# Altium PCB 1-10V_PIR_V1.0.PcbDoc (part 1 of 2)
Units mil, origin at the board's own origin, x right, y up, seen from the top; angles counter-clockwise.
Board outline 1736.22 x 1720.47 mil, 4 copper layers (Top Layer, Layer 1, Layer 2, Bottom Layer), stack 61.811 mil thick; 71 components, 58 nets, 292 pads, 69 vias.
Unrouted connection lines stored in the file: 118.
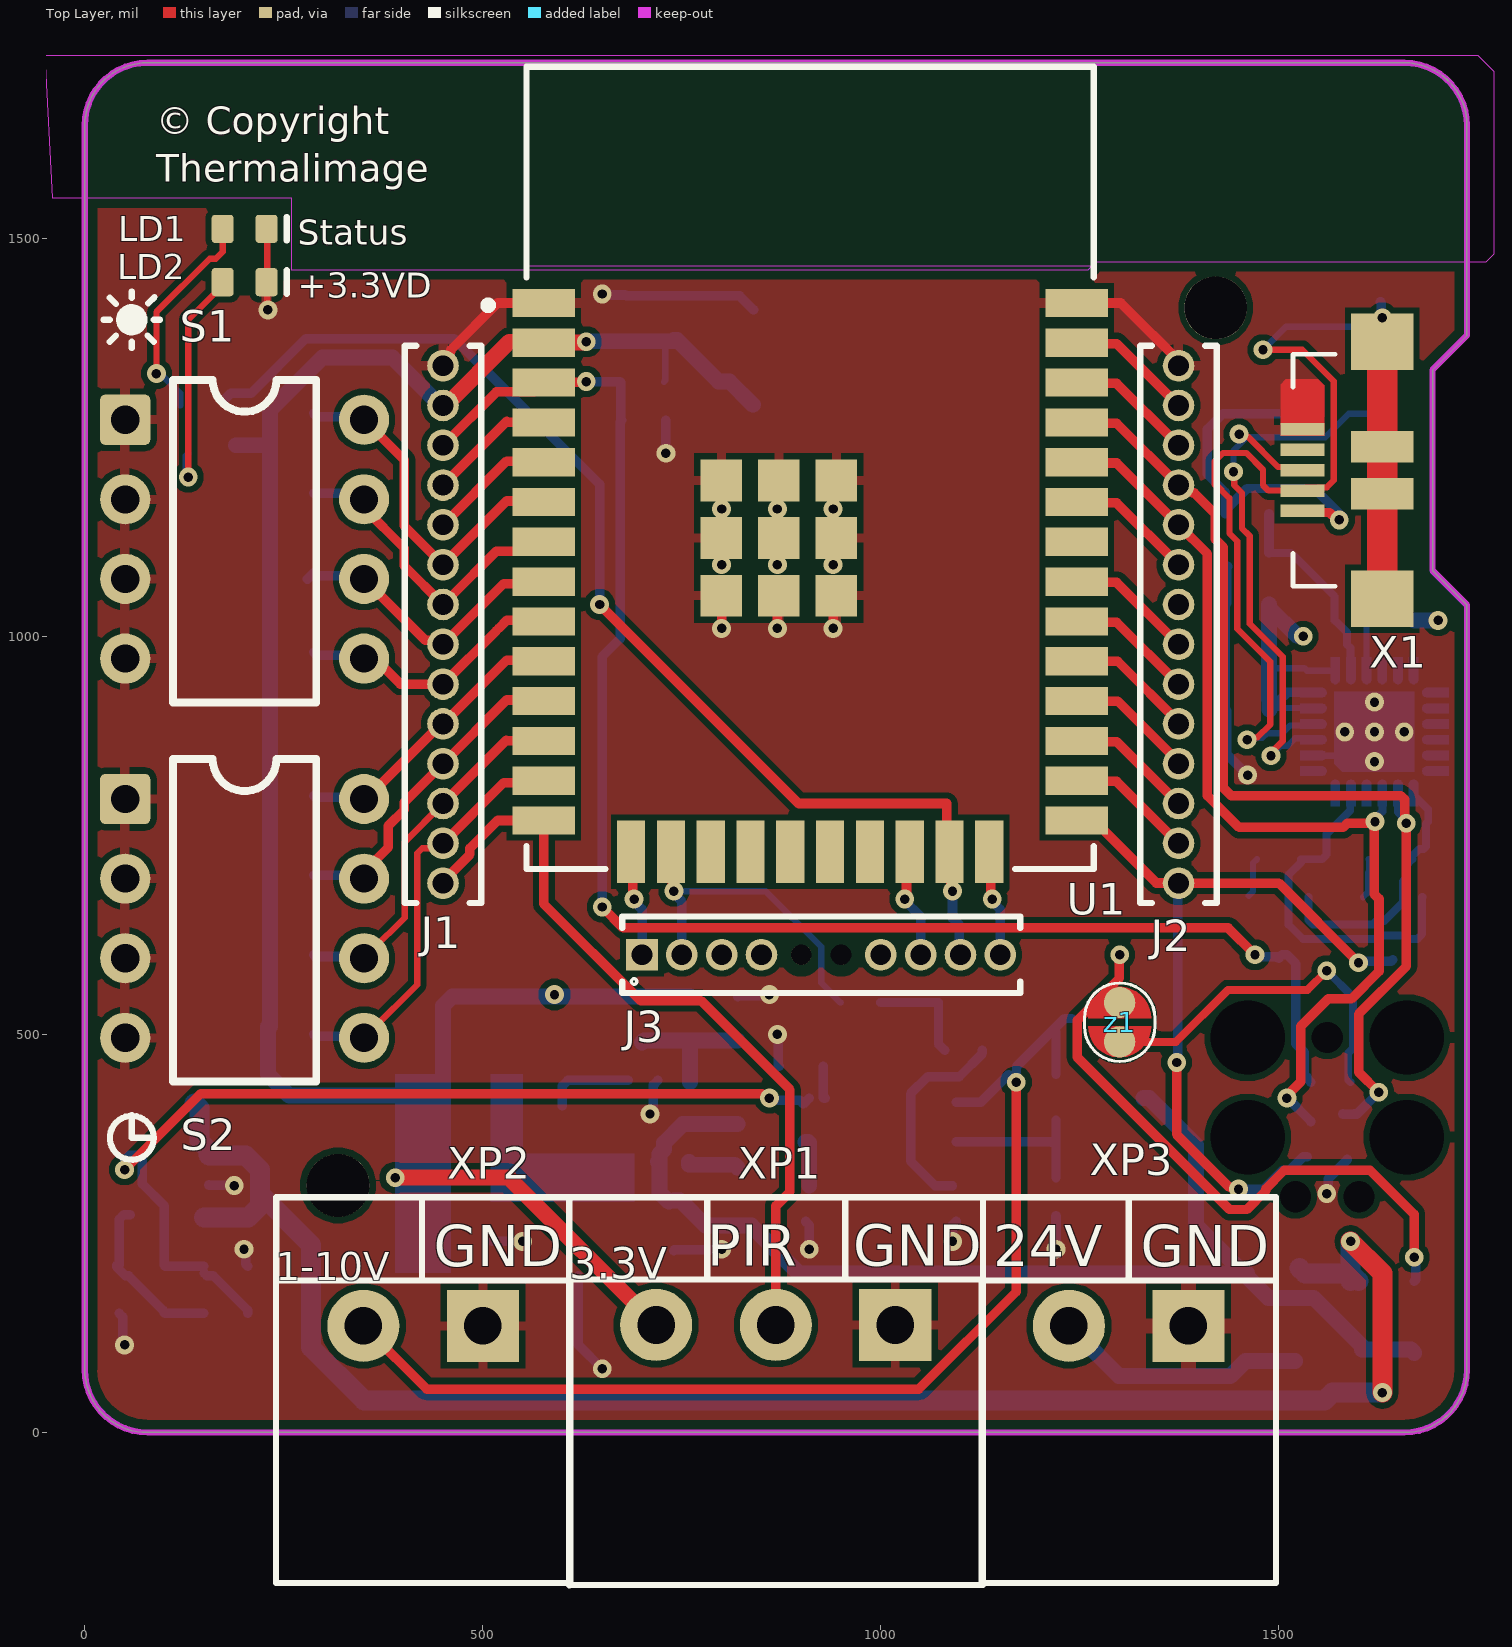
[diagram p0: Top Layer view]
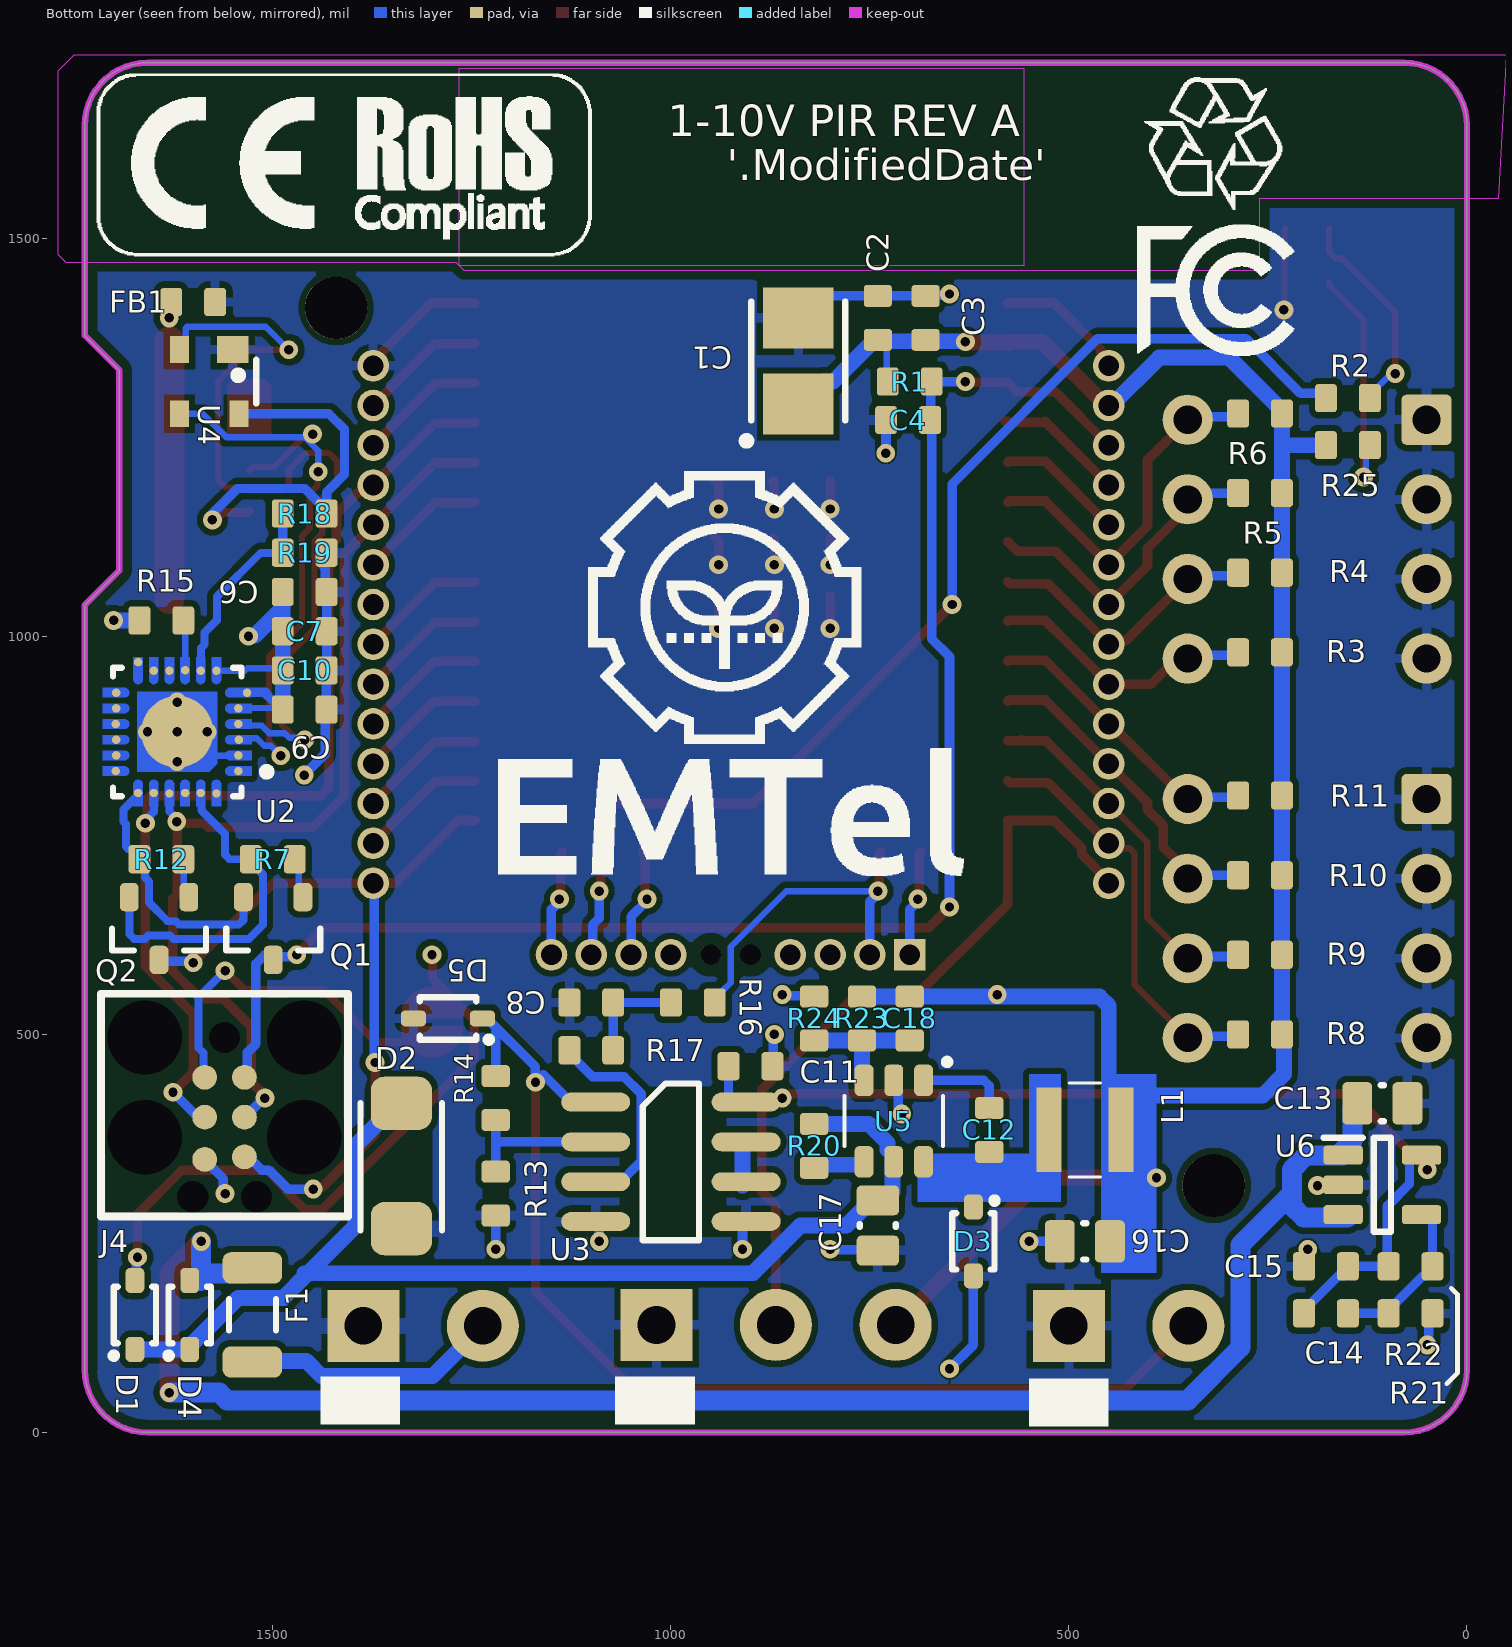
[diagram p1: Bottom Layer view, seen from below]
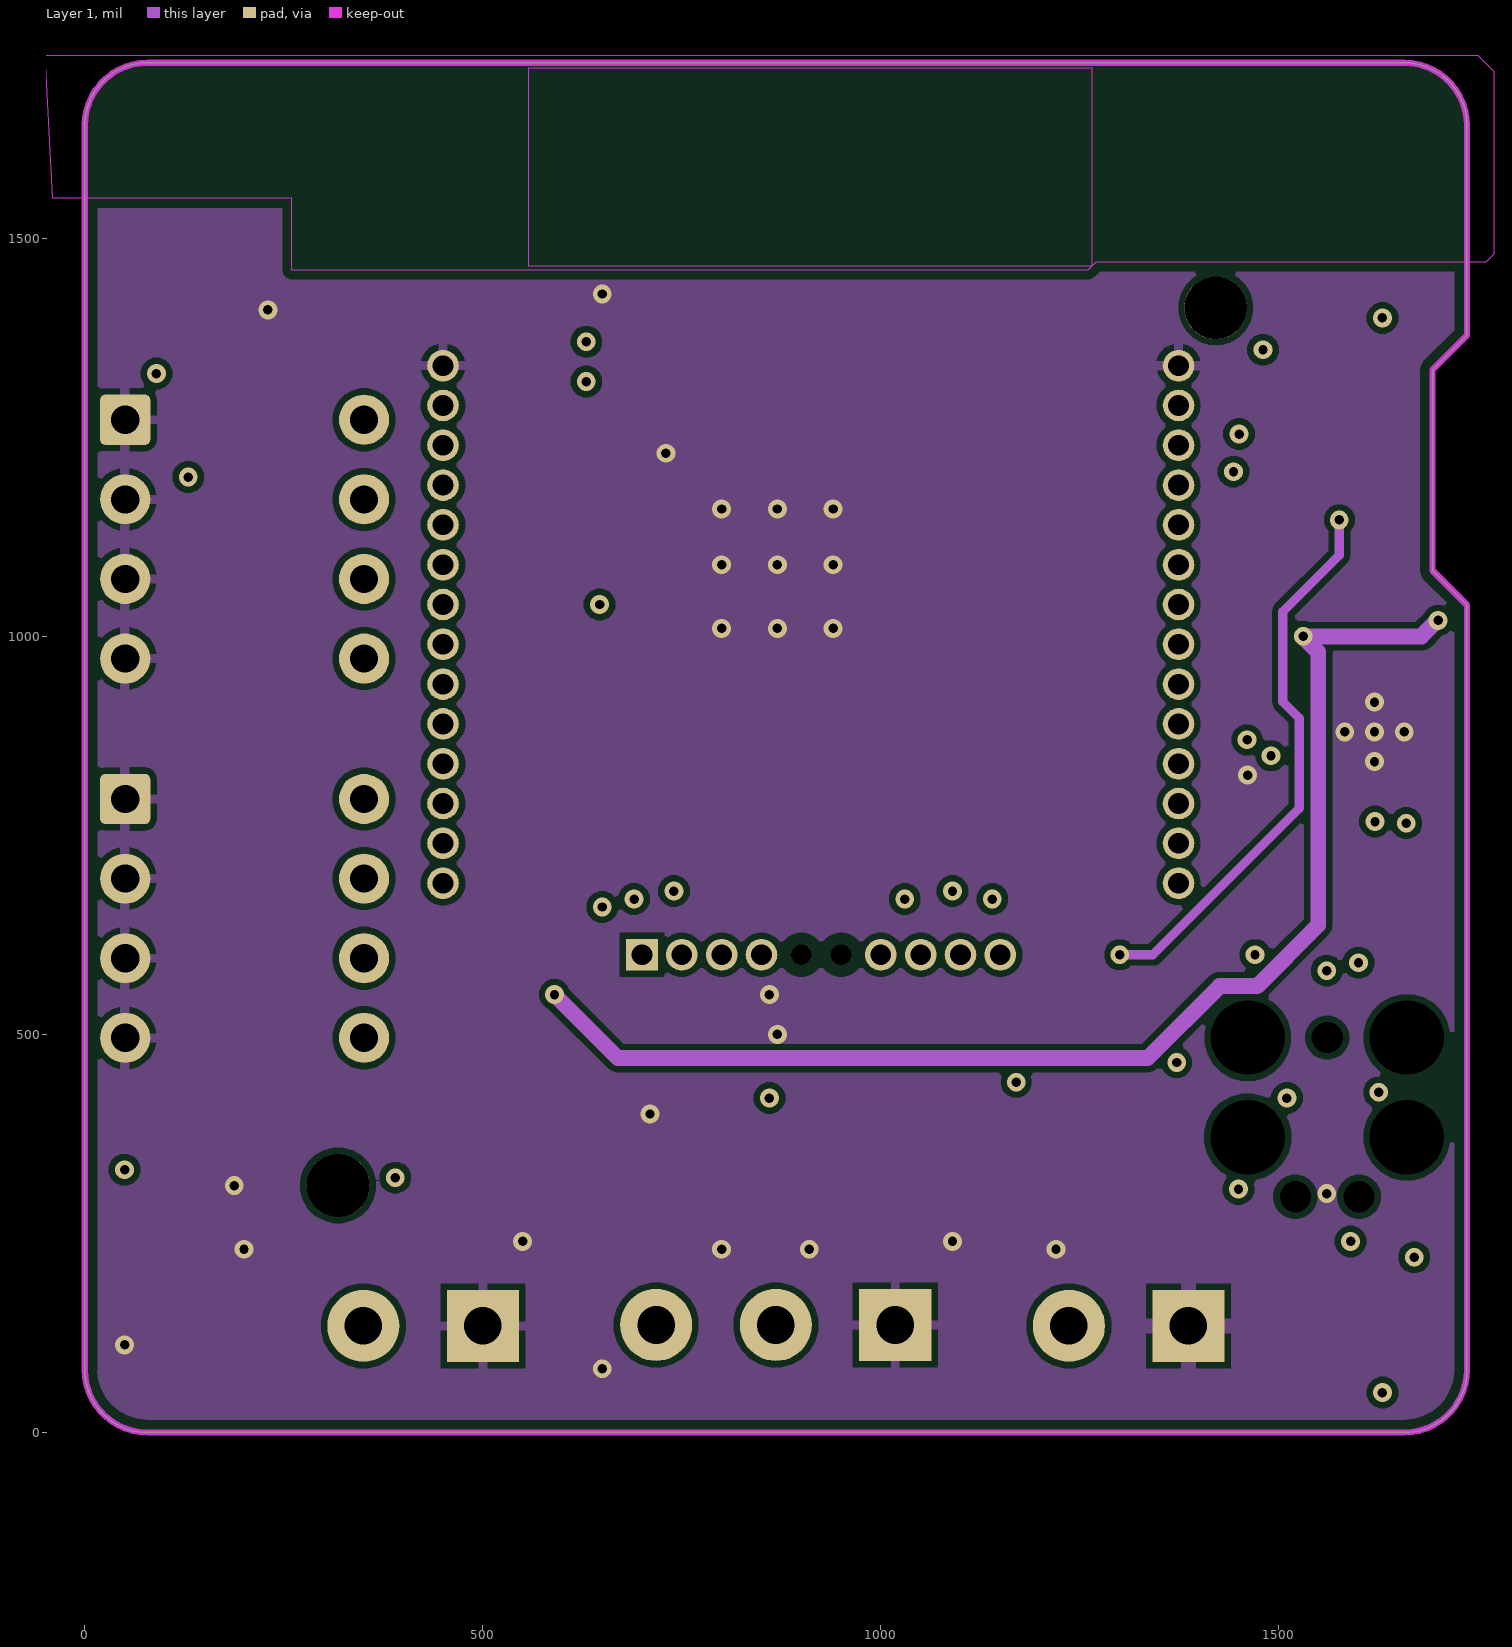
[diagram p2: Layer 1]
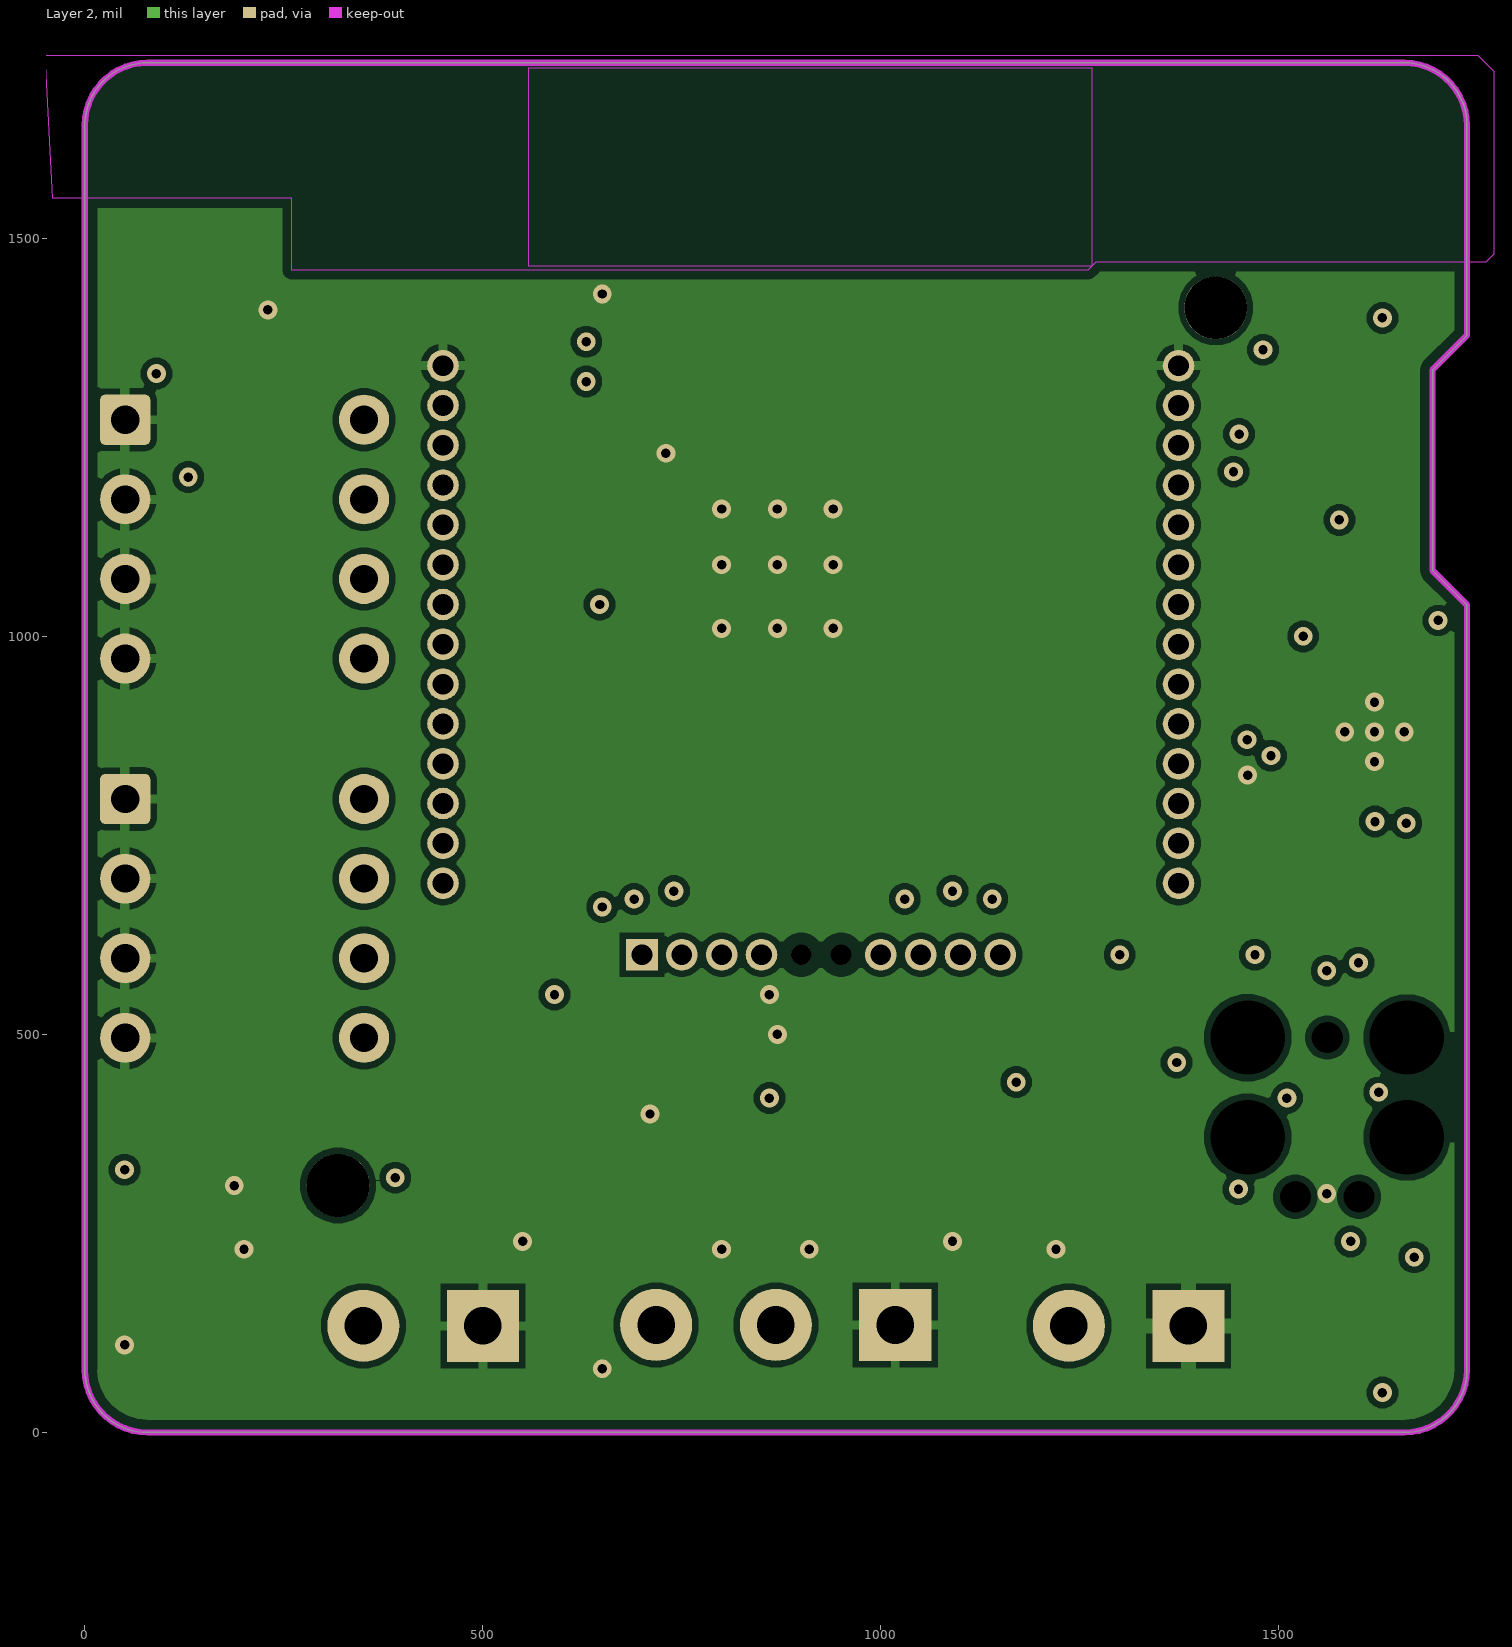
[diagram p3: Layer 2]
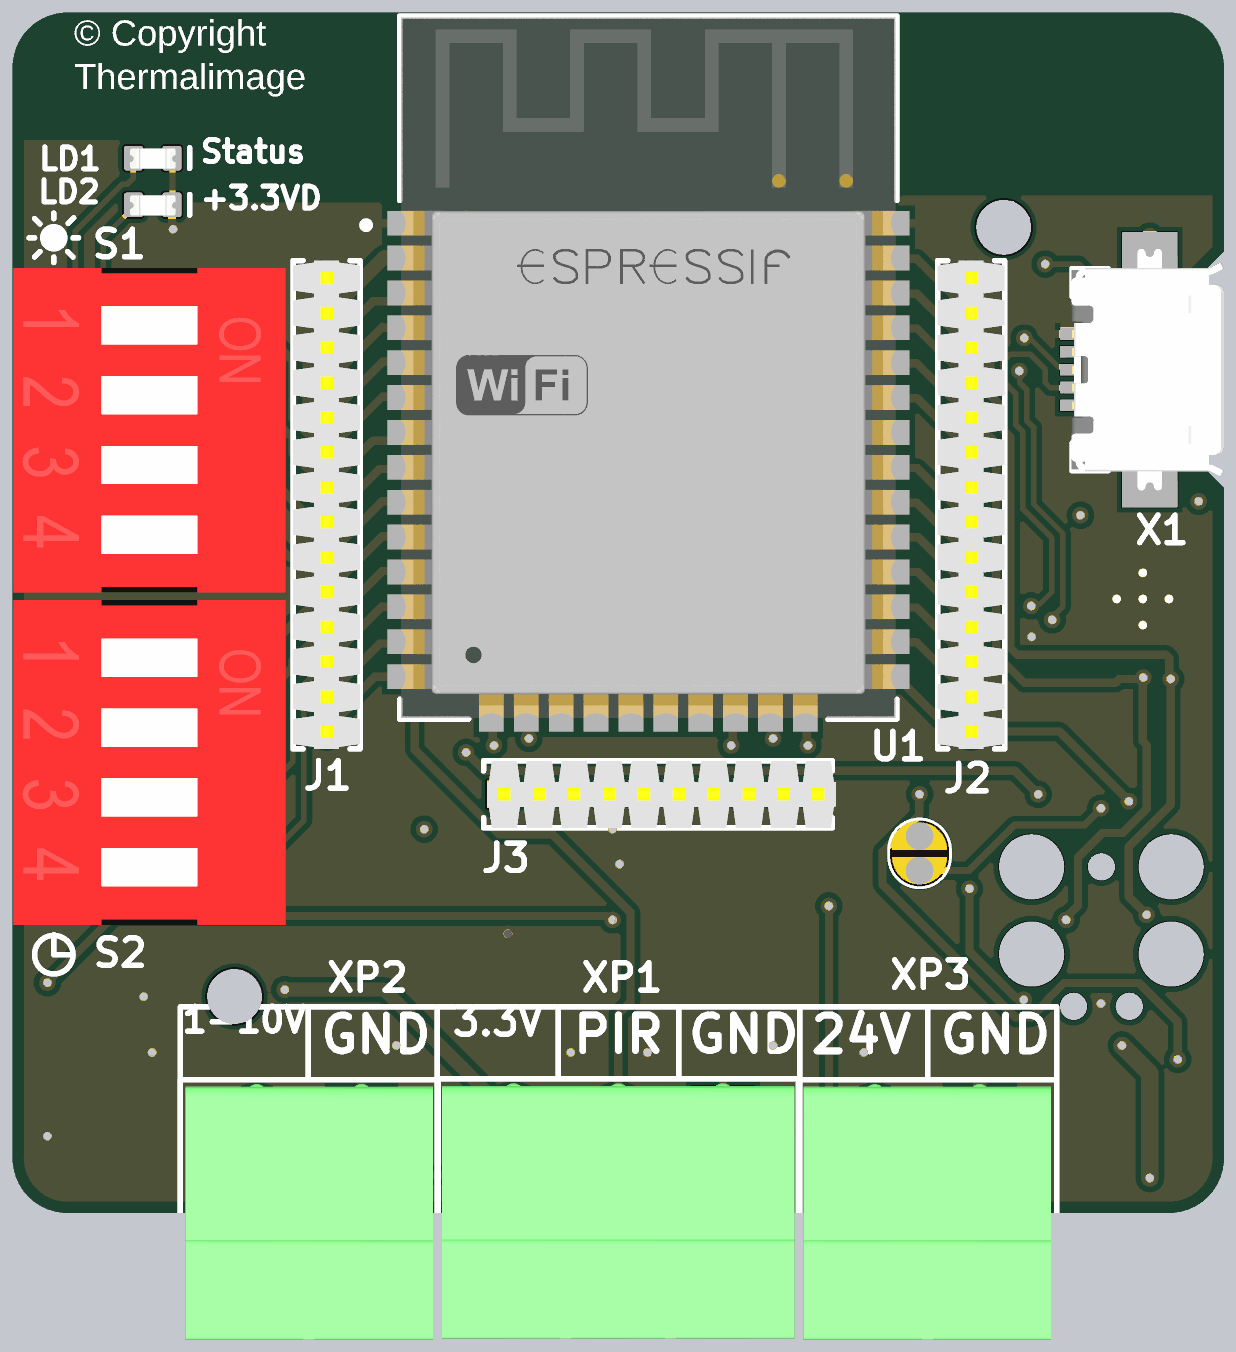
[diagram p5: 3D render of the assembled board from above, using the file's embedded part models]
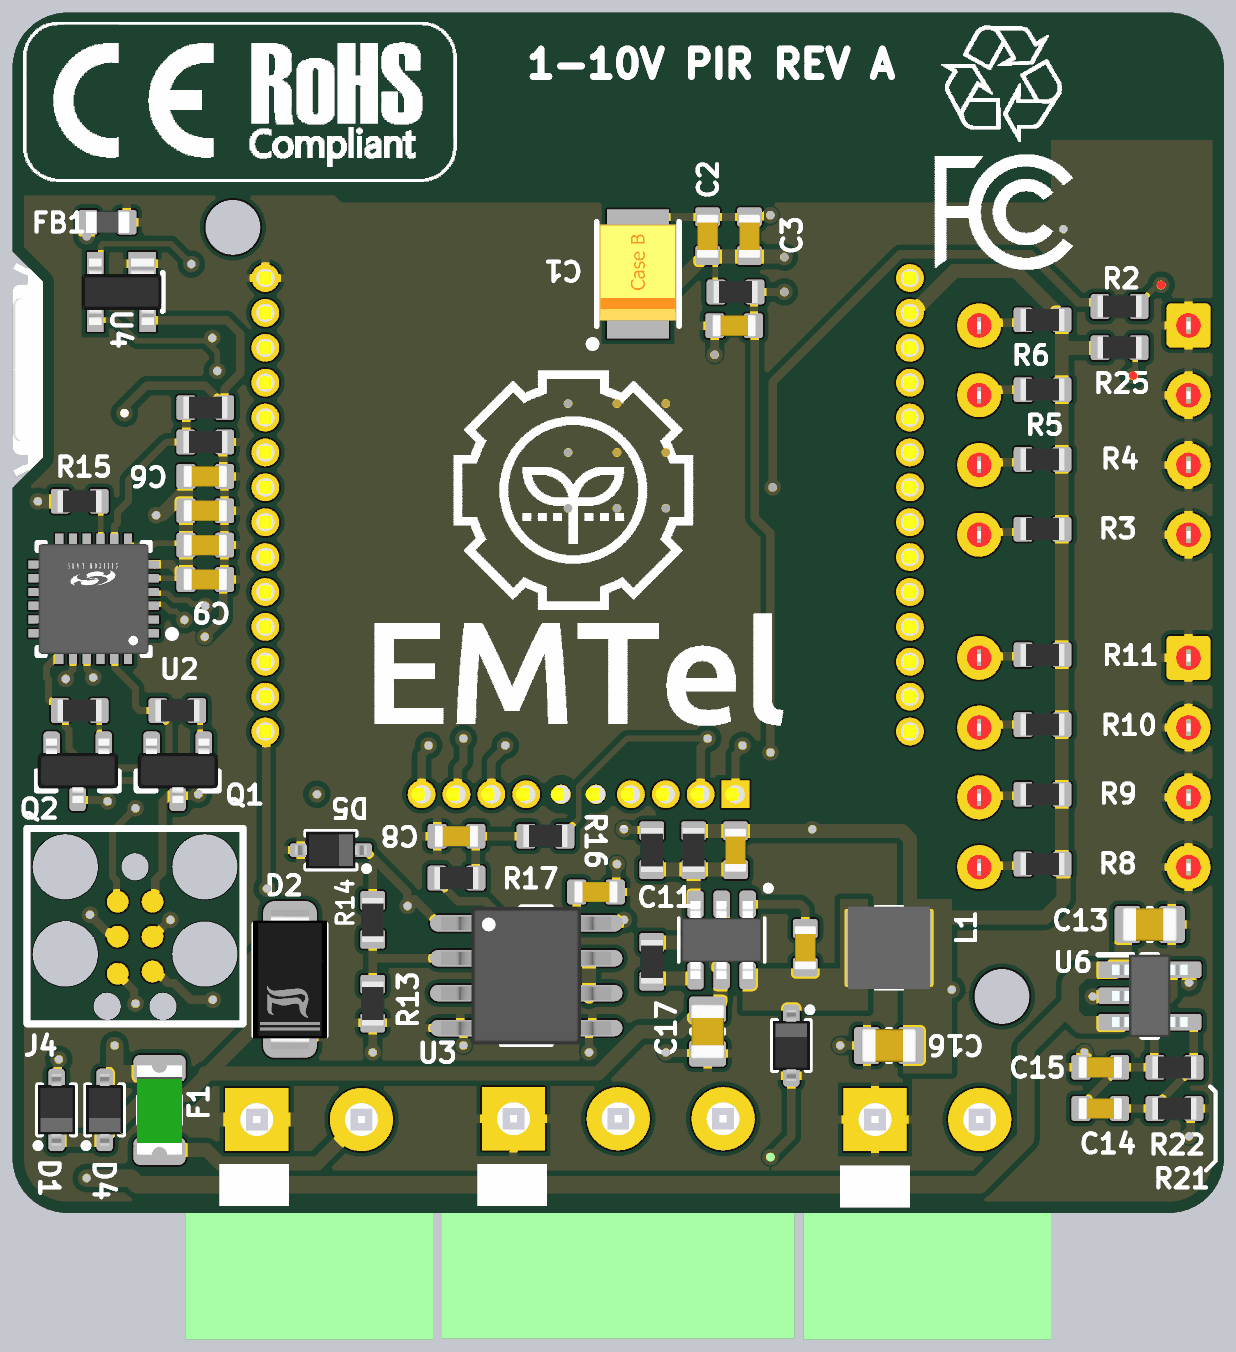
[diagram p6: 3D render of the assembled board from below, using the file's embedded part models]

## Layer stack, top to bottom
Top Solder: solder mask 0.7874, Solder Resist, Dk 3.8
Top Layer: signal copper 1.378
Dielectric 2: prepreg 7.874, 7628, Dk 4.6
Layer 1: signal copper 0.689
Dielectric 1: dielectric 41.9291, FR-4, Dk 4.5
Layer 2: signal copper 0.689
Dielectric 3: prepreg 7.874, 7628, Dk 4.6
Bottom Layer: signal copper 1.378
Bottom Solder: solder mask 0.7874, Solder Resist, Dk 3.8

## Board outline
0,78.74 ccw(c78.74,78.74) 78.74,0 1657.48,0 ccw(c1657.48,78.74) 1736.22,78.74 1736.22,1039.37 1692.91,1082.68 1692.91,1334.65 1736.22,1377.95 1736.22,1641.73 ccw(c1657.48,1641.73) 1657.48,1720.47 78.74,1720.47 ccw(c78.74,1641.73) 0,1641.73

## Design rules (kind name [scope] priority, off if disabled: settings)
BoardOutlineClearance [IsPolygon] p1: gap=5 ignorepadtopadclearanceinfootprint=FALSE
Clearance Clearance_Keep_Out [OnLayer('Keep-Out Layer')] p1: gap=11.81 ignorepadtopadclearanceinfootprint=FALSE
Clearance [All] p2: gap=7.87 ignorepadtopadclearanceinfootprint=FALSE except(0: Arc-Hole Track-Hole SMDPad-Hole THPad-Hole Via-Hole Fill-Hole Poly-Hole Region-Hole Text-Hole)
DiffPairsRouting [All] p1: maxlimit=7.87 minlimit=7.87 mostfreqgap=7.87 toplayer_minwidth=7.87 toplayer_maxwidth=7.87 toplayer_prefwidth=7.87 midlayer1_minwidth=7.87 midlayer1_maxwidth=7.87 midlayer1_prefwidth=7.87 midlayer2_minwidth=7.87 midlayer2_maxwidth=7.87 midlayer2_prefwidth=7.87 bottomlayer_minwidth=7.87 bottomlayer_maxwidth=7.87 bottomlayer_prefwidth=7.87 maxuncoupledlength=500
MinimumSolderMaskSliver [All] p1: minsoldermaskwidth=3.94
PolygonConnect PolygonConnect_Vias [All vs IsVia] p1: connectstyle=Direct reliefconductorwidth=10 reliefentries=4 polygonreliefangle="90 Angle" airgapwidth=10
PolygonConnect PolygonConnect_Comp [All vs InComponent('XP3') or InComponent('D2')] p2: connectstyle=Relief reliefconductorwidth=19.68 reliefentries=4 polygonreliefangle="90 Angle" airgapwidth=7.87
PolygonConnect [All] p3: connectstyle=Relief reliefconductorwidth=11.81 reliefentries=4 polygonreliefangle="90 Angle" airgapwidth=7.87
RoutingVias [All] p1: holewidth=28 width=50 viastyle="Through Hole" minholewidth=11.81 minwidth=23.62 maxholewidth=28 maxwidth=50
SilkToSilkClearance [All] p1: silktosilkclearance=3.94
SilkToSolderMaskClearance [IsPad] p1: minsilkscreentomaskgap=5.91 clearancetoexposedcopper=TRUE
SolderMaskExpansion SolderMaskExpansion_vias [isvia] p1: expansion=4 istentingtop=TRUE
SolderMaskExpansion [All] p2: expansion=2.76 istentingtop=FALSE
Width [All] p1: maxlimit=39.37 minlimit=7.87 preferedwidth=7.87
26 further rules are at their usual default settings.

## Classes and differential pairs
component class "[2] - PWR": C12 C13 C14 C15 C16 C17 C18 D1 D2 D3 D4 F1 L1 LD2 R20 R21 R22 R23 R24 R25 U5 U6 XP3
component class "[1] - MCU": C1 C2 C3 C4 C6 C7 C8 C9 C10 C11 D5 FB1 J1 J2 J3 J4 LD1 Q1 Q2 R1 R2 R3 R4 R5 R6 R7 R8 R9 R10 R11 R12 R13 R14 R15 R16 R17 R18 R19 S1 S2 U1 U2 U3 U4 X1 XP1 XP2 z1
differential pair USB: +USB_P -USB_N

## Components (designator, comment, footprint, x,y, rotation, side; value= is the part's Value field where it differs from the comment)
C1 "330uF" "TANT CAP CASE B" 840,1345.87 r90 bottom
C2 "1uF" CC0603 740,1400 r90 bottom
C3 "100nF" CC0603 680,1400 r90 bottom
C4 "1uF" CC0603 702.02,1271.68 r0 bottom
C6 "4.7uF" CC0603 1460,1055.69 r180 bottom
C7 "100nF" CC0603 1460,1006.44 r180 bottom
C8 "100nF" CC0603 1100,540 r0 bottom
C9 "4.7uF" CC0603 1460,907.95 r180 bottom
C10 "100nF" CC0603 1460,957.2 r180 bottom
C11 "100nF" CC0603 900,460 r180 bottom
C12 "100nF" CC0603 600,380 r90 bottom
C13 "4.7uF" CC0805 106.3,413.39 r180 bottom
C14 "1nF" CC0603 177.17,149.61 r180 bottom
C15 "1uF" CC0603 177.17,208.66 r0 bottom
C16 "22uF" CC0805 480,240 r0 bottom
C17 "4.7uF" CC0805 740,260 r270 bottom
C18 "33pF" CC0603 700,520 r90 bottom
D1 "Diode" SOD323#1 1673.23,147.64 r90 bottom
D2 "SMAJ30CA" SMA 1338.58,334.65 r90 bottom
D3 "Diode" SOD323#1 620,240 r270 bottom
D4 "PMEG3010BEA,115" SOD323#1 1604.33,147.64 r90 bottom
D5 "CDSOD323-T12SC" SOD323#2 1280,520 r0 bottom
F1 "0ZCJ0016FF2E" FUSE1206 1525.59,147.64 r90 bottom
FB1 "120R/800mA" ind0603 1600,1420 r0 bottom
J1 "TMS-114-02-L-S" TMS-114-YY-XX-S 450,1340 r270 top locked
J2 "TMS-114-02-L-S" TMS-114-YY-XX-S 1373.92,1340 r270 top locked
J3 "TMS-110-02-L-S" SAMTEC_TMS-110-02-L-S 925,600 r0 top locked
J4 "TC2030-IDC" TC2030-IDC 1560.63,496.06 r270 bottom locked
L1 "TYS30102R2N-10" TYS30102R2N10 480,380 r180 bottom value="2.2 uH"
LD1 "LED" LED0603 200.79,1511.81 r180 top
LD2 "LED" LED0603 200.79,1444.88 r180 top
Q1 "BC817-40LT3G" SOT23-3 1499.57,633 r90 bottom
Q2 "BC817-40LT3G" SOT23-3 1642.89,633 r90 bottom
R1 "10k" RC0603 700,1320 r0 bottom
R2 "1k" RC0603 149.61,1299.21 r0 bottom
R3 "10k" RC0603 260,980 r180 bottom
R4 "10k" RC0603 260,1080 r180 bottom
R5 "10k" RC0603 260,1180 r180 bottom
R6 "10k" RC0603 260,1280 r180 bottom
R7 "10k" RC0603 1500,720 r0 bottom
R8 "10k" RC0603 260,500 r180 bottom
R9 "10k" RC0603 260,600 r180 bottom
R10 "10k" RC0603 260,700 r180 bottom
R11 "10k" RC0603 260,800 r180 bottom
R12 "10k" RC0603 1640,720 r0 bottom
R13 "10k" RC0603 1220,300 r90 bottom
R14 "22k" RC0603 1220,420 r90 bottom
R15 "1k" RC0603 1640,1020 r0 bottom
R16 "100k" RC0603 972.44,540 r0 bottom
R17 "10k" RC0603 1100,480 r180 bottom
R18 "24k" RC0603 1460,1154.17 r180 bottom
R19 "47k" RC0603 1460,1104.93 r0 bottom
R20 "100k" RC0603 820,360 r270 bottom
R21 "1.8M" RC0603 70.87,208.66 r0 bottom
R22 "200k" RC0603 70.87,149.61 r0 bottom
R23 "124k" RC0603 760,520 r90 bottom
R24 "40.2k" RC0603 820,520 r90 bottom
R25 "1k" RC0603 149.61,1240.16 r0 bottom
S1 "SW-DIP4" SW-DIP-8 200.79,1122.05 r0 top locked
S2 "SW-DIP4" SW-DIP-8 200.79,645.67 r0 top locked
U1 "ESP32-WROOM-32E" ESP32-WROOM-32E-FOOTPRINT-1 911.23,1211.61 r0 top locked
U2 "CP2102N-A02-GQFN24" FP-CP2102N-A02-GQFN24-MFG 1620,880 r0 bottom
U3 "LM358DT" SO-8 1000,340 r270 bottom
U4 "PRTR5V0U2X" SOT190P230X110-4L 1580,1320 r270 bottom value="ESD Protection 8kV"
U5 "MP2451DJ-LF-Z" SOT95P280X110-6N 720,391.18 r270 bottom
U6 "NCV8730ASNADJT1G" SOT95P275X110-5N 106.3,311.02 r180 bottom
X1 "USB3085-30-A" USB3085-30-A 1579.72,1208.66 r90 top locked value="USB2.0 / Micro USB Type AB"
XP1 "Header 3x1pins" "MC 1,5_3-G-3,81" 1018.11,134.99 r180 top locked
XP2 "Header 2x1pins" "MC 1,5_2-G-3,81" 500,133.86 r180 top locked
XP3 "Header 2x1pins" "MC 1,5_2-G-3,81" 1386.22,133.86 r180 top locked
z1 "SHORT" PAD_JUMPER 1300,520.32 r270 top

## Footprints (in the part's own frame and the unit in brackets; to place one, negate y for a bottom-side part, rotate by r counter-clockwise, add the part's x,y. Pads: shape width x height; smd on the part's side, far side on the other; paste and mask are expansions set on the pad)
CC0603 [mm] "Chip Capacitor, 2-Leads, Body 1.6x0.8mm"
  rrect30% 0.7x0.9 smd: 1(-0.7,0) 2(0.7,0)
  Top Layer pour cut-out: -0.483,0.432 -0.483,-0.432 0.483,-0.432 0.483,0.432
  body extent -0.8,-0.4 0.8,0.4, height 0.9
CC0805 [mm]
  rrect30% 0.95x1.35 smd: 1(-0.8,0) 2(0.8,0)
  Top Layer pour cut-out: -0.325,0.525 0.325,0.525 0.325,-0.525 -0.325,-0.525
  silkscreen extent -0.05,-0.57 0.05,0.58, body extent -1,-0.62 1,0.63, height 1.35
ESP32-WROOM-32E-FOOTPRINT-1 [mm]
  rect 2x0.9 smd paste+0 mask+0: 1(-8.5,5.26) 2(-8.5,3.99) 3(-8.5,2.72) 4(-8.5,1.45) 5(-8.5,0.18) 6(-8.5,-1.09) 7(-8.5,-2.36) 8(-8.5,-3.63) 9(-8.5,-4.9) 10(-8.5,-6.17) 11(-8.5,-7.44) 12(-8.5,-8.71) 13(-8.5,-9.98) 14(-8.5,-11.25) 25(8.5,-11.25) 26(8.5,-9.98) 27(8.5,-8.71) 28(8.5,-7.44) 29(8.5,-6.17) 30(8.5,-4.9) 31(8.5,-3.63) 32(8.5,-2.36) 33(8.5,-1.09) 34(8.5,0.18) 35(8.5,1.45) 36(8.5,2.72) 37(8.5,3.99) 38(8.5,5.26)
  rect 0.9x2 smd paste+0 mask+0: 15(-5.715,-12.25) 16(-4.445,-12.25) 17(-3.175,-12.25) 18(-1.905,-12.25) 19(-0.635,-12.25) 20(0.635,-12.25) 21(1.905,-12.25) 22(3.175,-12.25) 23(4.445,-12.25) 24(5.715,-12.25)
  rect 1.33x1.33 smd paste+0 mask+0: 39(-2.835,-4.075) 39(-2.835,-2.24) 39(-2.835,-0.405) 39(-1,-4.075) 39(-1,-2.24) 39(-1,-0.405) 39(0.835,-4.075) 39(0.835,-2.24) 39(0.835,-0.405)
  Keep-Out Layer region: -9,6.45 9,6.45 9,12.75 -9,12.75
  silkscreen extent -10.4,-12.8 9.05,12.8, body extent -9.6,-13.35 9.6,12.9, height 0.25
FP-CP2102N-A02-GQFN24-MFG [mm]
  round 0.27 smd paste+0 mask+0: 1(-1.95,1.25) 2(-1.95,0.75) 3(-1.965,0.25) 4(-1.95,-0.25) 5(-1.95,-0.75) 6(-2.225,-1.25) 7(-1.25,-1.95) 8(-0.75,-1.95) 9(-0.25,-1.965) 10(0.25,-1.95) 11(0.75,-1.95) 12(1.25,-2.225) 13(1.95,-1.25) 14(1.95,-0.75) 15(1.965,-0.25) 16(1.95,0.25) 17(1.95,0.75) 18(1.965,1.25) 19(1.25,1.95) 20(0.75,1.95) 21(0.25,1.965) 22(-0.25,1.95) 23(-0.75,1.95) 24(-1.25,1.965)
  round 2.295 smd paste-2 mask+0: 25(0,0)
  Top Layer region: -1.275,-1.275 -1.275,1.025 -1.025,1.275 1.275,1.275 1.275,-1.275 -1.275,-1.275
  Top Layer region: -2.375,1.4 -1.675,1.4 -1.645,1.4 -1.59,1.377 -1.548,1.335 -1.525,1.28 -1.525,1.25 -1.525,1.22 -1.548,1.165 -1.59,1.123 -1.645,1.1 -1.675,1.1 -1.675,1.1 -2.375,1.1
  Top Layer region: -2.375,0.9 -1.675,0.9 -1.645,0.9 -1.59,0.877 -1.548,0.835 -1.525,0.78 -1.525,0.75 -1.525,0.72 -1.548,0.665 -1.59,0.623 -1.645,0.6 -1.675,0.6 -1.675,0.6 -2.375,0.6
  Top Layer region: -2.375,0.4 -1.675,0.4 -1.645,0.4 -1.59,0.377 -1.548,0.335 -1.525,0.28 -1.525,0.25 -1.525,0.22 -1.548,0.165 -1.59,0.123 -1.645,0.1 -1.675,0.1 -1.675,0.1 -2.375,0.1
  Top Layer region: -2.375,-0.1 -1.675,-0.1 -1.645,-0.1 -1.59,-0.123 -1.548,-0.165 -1.525,-0.22 -1.525,-0.25 -1.525,-0.28 -1.548,-0.335 -1.59,-0.377 -1.645,-0.4 -1.675,-0.4 -1.675,-0.4 -2.375,-0.4
  Top Layer region: -2.375,-0.6 -1.675,-0.6 -1.645,-0.6 -1.59,-0.623 -1.548,-0.665 -1.525,-0.72 -1.525,-0.75 -1.525,-0.78 -1.548,-0.835 -1.59,-0.877 -1.645,-0.9 -1.675,-0.9 -1.675,-0.9 -2.375,-0.9
  Top Layer region: -2.375,-1.1 -1.675,-1.1 -1.645,-1.1 -1.59,-1.123 -1.548,-1.165 -1.525,-1.22 -1.525,-1.25 -1.525,-1.28 -1.548,-1.335 -1.59,-1.377 -1.645,-1.4 -1.675,-1.4 -1.675,-1.4 -2.375,-1.4
  Top Layer region: -1.4,-2.375 -1.4,-1.675 -1.4,-1.645 -1.377,-1.59 -1.335,-1.548 -1.28,-1.525 -1.25,-1.525 -1.22,-1.525 -1.165,-1.548 -1.123,-1.59 -1.1,-1.645 -1.1,-1.675 -1.1,-1.675 -1.1,-2.375
  Top Layer region: -0.9,-2.375 -0.9,-1.675 -0.9,-1.645 -0.877,-1.59 -0.835,-1.548 -0.78,-1.525 -0.75,-1.525 -0.72,-1.525 -0.665,-1.548 -0.623,-1.59 -0.6,-1.645 -0.6,-1.675 -0.6,-1.675 -0.6,-2.375
  Top Layer region: -0.4,-2.375 -0.4,-1.675 -0.4,-1.645 -0.377,-1.59 -0.335,-1.548 -0.28,-1.525 -0.25,-1.525 -0.22,-1.525 -0.165,-1.548 -0.123,-1.59 -0.1,-1.645 -0.1,-1.675 -0.1,-1.675 -0.1,-2.375
  Top Layer region: 0.1,-2.375 0.1,-1.675 0.1,-1.645 0.123,-1.59 0.165,-1.548 0.22,-1.525 0.25,-1.525 0.28,-1.525 0.335,-1.548 0.377,-1.59 0.4,-1.645 0.4,-1.675 0.4,-1.675 0.4,-2.375
  Top Layer region: 0.6,-2.375 0.6,-1.675 0.6,-1.645 0.623,-1.59 0.665,-1.548 0.72,-1.525 0.75,-1.525 0.78,-1.525 0.835,-1.548 0.877,-1.59 0.9,-1.645 0.9,-1.675 0.9,-1.675 0.9,-2.375
  Top Layer region: 1.1,-2.375 1.1,-1.675 1.1,-1.645 1.123,-1.59 1.165,-1.548 1.22,-1.525 1.25,-1.525 1.28,-1.525 1.335,-1.548 1.377,-1.59 1.4,-1.645 1.4,-1.675 1.4,-1.675 1.4,-2.375
  Top Layer region: 2.375,-1.4 1.675,-1.4 1.645,-1.4 1.59,-1.377 1.548,-1.335 1.525,-1.28 1.525,-1.25 1.525,-1.22 1.548,-1.165 1.59,-1.123 1.645,-1.1 1.675,-1.1 1.675,-1.1 2.375,-1.1
  Top Layer region: 2.375,-0.9 1.675,-0.9 1.645,-0.9 1.59,-0.877 1.548,-0.835 1.525,-0.78 1.525,-0.75 1.525,-0.72 1.548,-0.665 1.59,-0.623 1.645,-0.6 1.675,-0.6 1.675,-0.6 2.375,-0.6
  Top Layer region: 2.375,-0.4 1.675,-0.4 1.645,-0.4 1.59,-0.377 1.548,-0.335 1.525,-0.28 1.525,-0.25 1.525,-0.22 1.548,-0.165 1.59,-0.123 1.645,-0.1 1.675,-0.1 1.675,-0.1 2.375,-0.1
  Top Layer region: 2.375,0.1 1.675,0.1 1.645,0.1 1.59,0.123 1.548,0.165 1.525,0.22 1.525,0.25 1.525,0.28 1.548,0.335 1.59,0.377 1.645,0.4 1.675,0.4 1.675,0.4 2.375,0.4
  Top Layer region: 2.375,0.6 1.675,0.6 1.645,0.6 1.59,0.623 1.548,0.665 1.525,0.72 1.525,0.75 1.525,0.78 1.548,0.835 1.59,0.877 1.645,0.9 1.675,0.9 1.675,0.9 2.375,0.9
  Top Layer region: 2.375,1.1 1.675,1.1 1.645,1.1 1.59,1.123 1.548,1.165 1.525,1.22 1.525,1.25 1.525,1.28 1.548,1.335 1.59,1.377 1.645,1.4 1.675,1.4 1.675,1.4 2.375,1.4
  Top Layer region: 1.4,2.375 1.4,1.675 1.4,1.645 1.377,1.59 1.335,1.548 1.28,1.525 1.25,1.525 1.22,1.525 1.165,1.548 1.123,1.59 1.1,1.645 1.1,1.675 1.1,1.675 1.1,2.375
  Top Layer region: 0.9,2.375 0.9,1.675 0.9,1.645 0.877,1.59 0.835,1.548 0.78,1.525 0.75,1.525 0.72,1.525 0.665,1.548 0.623,1.59 0.6,1.645 0.6,1.675 0.6,1.675 0.6,2.375
  Top Layer region: 0.4,2.375 0.4,1.675 0.4,1.645 0.377,1.59 0.335,1.548 0.28,1.525 0.25,1.525 0.22,1.525 0.165,1.548 0.123,1.59 0.1,1.645 0.1,1.675 0.1,1.675 0.1,2.375
  Top Layer region: -0.1,2.375 -0.1,1.675 -0.1,1.645 -0.123,1.59 -0.165,1.548 -0.22,1.525 -0.25,1.525 -0.28,1.525 -0.335,1.548 -0.377,1.59 -0.4,1.645 -0.4,1.675 -0.4,1.675 -0.4,2.375
  Top Layer region: -0.6,2.375 -0.6,1.675 -0.6,1.645 -0.623,1.59 -0.665,1.548 -0.72,1.525 -0.75,1.525 -0.78,1.525 -0.835,1.548 -0.877,1.59 -0.9,1.645 -0.9,1.675 -0.9,1.675 -0.9,2.375
  Top Layer region: -1.1,2.375 -1.1,1.675 -1.1,1.645 -1.123,1.59 -1.165,1.548 -1.22,1.525 -1.25,1.525 -1.28,1.525 -1.335,1.548 -1.377,1.59 -1.4,1.645 -1.4,1.675 -1.4,1.675 -1.4,2.375
  silkscreen extent -2.97,-2.05 2.05,2.05, body extent -2,-2 2,2, height 0.8
FUSE1206 [mm] "Polymeric PTC Resettable Fuse, 3.25mm x 1.65mm, Concave"
  rrect50% 1x1.9 smd: 1(-1.5,0) 2(1.5,0)
  silkscreen extent -0.5,-0.75 0.5,0.75, body extent -1.63,-0.82 1.62,0.83, height 0.86
ind0603 [mm] "Ferrite Bead 0603"
  rrect30% 0.7x0.9 smd: 1(-0.7,0) 2(0.7,0)
  Top Layer pour cut-out: -0.483,0.432 -0.483,-0.432 0.483,-0.432 0.483,0.432
  body extent -0.8,-0.4 0.8,0.4, height 0.96
LED0603 [mm] "Molded Diode, 2-Leads, Body"
  rrect30% 0.7x0.9 smd: 1(-0.7,0) 2(0.7,0)
  Top Layer pour cut-out: -0.483,0.432 -0.483,-0.432 0.483,-0.432 0.483,0.432
  silkscreen extent -1.35,-0.38 -1.35,0.37, body extent -0.83,-0.35 0.82,0.38, height 0.68
"MC 1,5_2-G-3,81" [mm]
  rect 2.3x2.3 hole 1.2: 1(0,0)
  round 2.3 hole 1.2: 2(3.81,0)
  silkscreen extent -2.8,-1.45 6.6,8.2, body extent -2.6,-1.3 6.41,8, height 7.25
"MC 1,5_3-G-3,81" [mm]
  rect 2.3x2.3 hole 1.2: 1(0,0)
  round 2.3 hole 1.2: 2(3.81,0) 3(7.63,0)
  silkscreen extent -2.8,-1.45 10.4,8.3, body extent -2.6,-1.3 10.22,8, height 7.25
PAD_JUMPER [mm] "SOLDER BRIDGE JUMPER"
  round 1 smd mask-15: 1(-0.5,0) 2(0.754,0)
  Top Layer region: 0,-1 -0.434,-0.901 -0.782,-0.623 -0.975,-0.223 -0.975,0.223 -0.782,0.623 -0.434,0.901 0,1 0,1
  Top Layer region: 0.254,-1 0.254,1 0.688,0.901 1.036,0.623 1.229,0.223 1.229,-0.223 1.036,-0.623 0.688,-0.901 0.254,-1
  silkscreen extent -1.13,-1.13 1.38,1.13
RC0603 [mm] "Chip Resistor, 2-Leads, Body 1.6x0.8mm, IPC Medium Density"
  rrect30% 0.7x0.9 smd: 1(-0.7,0) 2(0.7,0)
  Top Layer pour cut-out: -0.483,0.432 -0.483,-0.432 0.483,-0.432 0.483,0.432
  body extent -0.8,-0.4 0.8,0.4, height 0.49
SAMTEC_TMS-110-02-L-S [mm]
  rect 1.01x1.01 hole 0.66: 1(-5.715,0)
  round 1.01 hole 0.66: 2(-4.445,0) 3(-3.175,0) 4(-1.905,0) 7(1.905,0) 8(3.175,0) 9(4.445,0) 10(5.715,0)
  round 0.635 hole 0.66: 5(-0.635,0) 6(0.635,0)
  silkscreen extent -6.35,-1.22 6.35,1.22, body extent -6.22,-1.22 6.48,1.22, height 5.08
SMA [mm] "Molded Diode, 2-Leads, Body 4.3x2.7mm, IPC Medium Density"
  rrect50% 1.7x1.95 smd: 1(-2,0) 2(2,0)
  Top Layer pour cut-out: -1.15,1 -1.15,-1 1.15,-1 1.15,1
  silkscreen extent -2.05,-1.3 2,1.3, body extent -2.56,-1.35 2.56,1.35, height 1.96
SO-8 [mm] "SOIC, 8-Leads, Body 5,0x4,0mm (max), Pitch 1,27mm, IPC Medium Density"
  oval 0.6x2.2 smd: 1(-1.905,-2.4) 2(-0.635,-2.4) 3(0.635,-2.4) 4(1.905,-2.4) 5(1.905,2.4) 6(0.635,2.4) 7(-0.635,2.4) 8(-1.905,2.4)
  Top Layer pour cut-out: -2.413,-1.651 -2.413,1.778 2.286,1.778 2.413,1.651 2.413,-1.651
  silkscreen extent -2.5,-0.9 2.5,0.9, body extent -2.5,-3.1 2.5,3.1, height 1.85
SOD323#1 [mm] "Molded Diode, 2-Leads, Body 3x1.5mm, IPC Medium Density"
  rrect50% 0.8x0.6 smd: 1(-1.1,0) 2(1.1,0)
  silkscreen extent -1.37,-0.67 0.9,0.75, body extent -1.3,-0.68 1.3,0.67, height 1.1
SOD323#2 [mm] "Molded Diode, 2-Leads, Body 3x1.5mm, IPC Medium Density"
  rrect50% 0.8x0.5 smd: 1(-1.1,0) 2(1.1,0)
  silkscreen extent -1.37,-0.67 0.9,0.75, body extent -1.3,-0.68 1.3,0.67, height 1.1
SOT23-3 [mm] "SOT23, 3-Leads, Body 3,0x2,6mm (max), Pitch 0,95mm, IPC Medium Density"
  rrect50% 0.9x0.6 smd: 1(1,-0.95) 2(1,0.95) 3(-1,0)
  silkscreen extent -0.7,-1.5 0,1.5, body extent -1.15,-1.47 1.19,1.45, height 1
SOT95P275X110-5N [mm]
  rrect30% 1.25x0.6 smd: 1(-1.25,0.95) 2(-1.25,0) 3(-1.25,-0.95) 4(1.25,-0.95) 5(1.25,0.95)
  silkscreen extent -1.88,-1.5 0.28,1.5, body extent -1.37,-1.5 1.38,1.5, height 1.1
SOT95P280X110-6N [mm]
  rrect50% 1x0.6 smd: 1(-1.3,0.95) 2(-1.3,0) 3(-1.3,-0.95) 4(1.3,-0.95) 5(1.3,0) 6(1.3,0.95)
  silkscreen extent -1.99,-1.57 0.8,1.8, body extent -1.42,-1.46 1.42,1.46, height 1.1
SOT190P230X110-4L [mm]
  rect 0.85x1 smd: 1(-1.025,0.75)
  rect 0.85x0.6 smd: 2(-1.025,-0.95) 3(1.025,-0.95) 4(1.025,0.95)
  silkscreen extent -0.7,0.8 0.7,1.5, body extent -1.21,-1.46 1.21,1.46, height 1
SW-DIP-8 [mm]
  rrect20% 1.6x1.6 hole 0.9: 1(-3.81,3.81)
  round 1.6 hole 0.9: 2(-3.81,1.27) 3(-3.81,-1.27) 4(-3.81,-3.81) 5(3.81,-3.81) 6(3.81,-1.27) 7(3.81,1.27) 8(3.81,3.81)
  silkscreen extent -2.29,-5.21 2.29,5.08, body extent -5.07,-5.91 4.83,5.91, height 7.41
"TANT CAP CASE B" [mm]
  rect 1.95x2.25 smd: 1(-1.375,0) 2(1.375,0)
  silkscreen extent -2.67,-1.5 1.9,1.78, body extent -1.7,-1.4 1.8,1.4, height 1.9
TC2030-IDC [mm] "Tag-Connect 6-Pin with Legs (PN# TC2030-IDC-NL)"
  round 2.3 hole 2.375 unplated: 0(0,-2.54) 0(0,2.54) 0(3.175,-2.54) 0(3.175,2.54)
  round 0.9 hole 0.995 unplated: 0(0,0) 0(5.08,-1.016) 0(5.08,1.016)
  round 0.79 smd paste-0.39: 1(1.27,-0.635) 2(1.27,0.635) 3(2.54,-0.635) 4(2.54,0.635) 5(3.89,-0.635) 6(3.81,0.635)
  Top Layer pour cut-out: -1.27,-3.81 5.588,-3.81 5.588,3.81 -1.27,3.81 5.588,3.81 -1.27,3.81
  silkscreen extent -1.4,-3.94 5.72,3.94
TMS-114-YY-XX-S [mm]
  round 1.01 hole 0.66: 1(0,0) 2(1.27,0) 3(2.54,0) 4(3.81,0) 5(5.08,0) 6(6.35,0) 7(7.62,0) 8(8.89,0) 9(10.16,0) 10(11.43,0) 11(12.7,0) 12(13.97,0) 13(15.24,0) 14(16.51,0)
  silkscreen extent -0.64,-1.22 17.14,1.22, body extent -0.63,-1.22 17.15,1.22, height 5.08
TYS30102R2N10 [mm]
  rect 0.8x2.7 smd: 1(-1.15,0) 2(1.15,0)
  silkscreen extent -0.5,-1.5 0.5,1.5, body extent -1.5,-1.5 1.5,1.5, height 1.3
USB3085-30-A [mm]
  rect 0.4x1.4 smd paste+0.012 mask+0.05: 1(-1.3,1.275) 2(-0.65,1.275) 3(0,1.275) 4(0.65,1.275) 5(1.3,1.275)
  rect 1.8x2 smd paste+0.012 mask+0.05: 6(-4.1,-1.275) 9(4.1,-1.275)
  rect 1x2 smd paste+0.012 mask+0.05: 7(-0.75,-1.275) 8(0.75,-1.275)
  silkscreen extent -3.7,0.23 3.7,1.57, body extent -4.4,-3.98 4.4,1.57, height 2.64

## Part data
C1: library part Capacitors_SMD_TANT, "Surface Mount Tantalum Capacitor, 330 µF, 6.3 V, 1411 [3528 Metric], ± 20%, 0.8 ohm, B", Leakage Current=10uA, Manufacturer=KEMET, Manufacturer Part Number=T490B337M006ATE800, Operating Temperature Range="-55 to +125C", Tolerance=+/-20%, Working Voltage=6.3V, Digikey Link=https://www.digikey.com/products/en?keywords=490B337M006ATE800, ESR ESL=800mOhm, Farnell Link=https://uk.farnell.com/search?st=T490B337M006ATE800, Material="robust MnO2", Mouser Link=https://eu.mouser.com/ProductDetail/KEMET/T490B337M006ATE800?qs=sGAEpiMZZMuEN2agSAc2pgET7l35QYXOsH8qSVOu0i72mFceis6X4Q%3d%3d, PatternType="Case B", TCC=+/-30ppm
C2 C4 C15: library part Capacitors_SMD, "SMD Multilayer Ceramic Capacitor, 1 µF, 16 V, 0603 [1608 Metric], ± 10%, X7R, MC", Dielectric=X7R, Leakage Current=10uA, Manufacturer=MULTICOMP, Manufacturer Part Number=MC0603B105K160CT, Operating Temperature Range="-55C to 125C", Tolerance=+/-10%, Working Voltage=16V, ESR ESL=0.1Ohm/100MHz, Farnell Link=https://uk.farnell.com/w/c/passive-components/capacitors/ceramic-capacitors/smd-ceramic-multilayer-mlcc-capacitors?brand=pro-power|stellar-labs|pro-elec|defender-security|duratool|tenma|mcm-custom-audio|pro-signal|mcm|multicomp&ceramic-capacitor-case=0603-1608-metric-&capacitance=1uf, Material=Ceramic, PatternType=0603, TCC=+/-30ppm
C3 C7 C8 C10 C11: library part Capacitors_SMD, "SMD Multilayer Ceramic Capacitor, 0.1 µF, 16 V, 0603 [1608 Metric], ± 10%, X7R, MC", Dielectric=X7R, Leakage Current=10uA, Manufacturer=MULTICOMP, Manufacturer Part Number=MC0603B104K160CT, Operating Temperature Range="-55C to 125C", Tolerance=+/-10%, Working Voltage=16V, Digikey Link=https://www.digikey.com/product-detail/en/avx-corporation/06033C104KAT2A/478-3714-1-ND/1116412, ESR ESL=0.1Ohm/100MHz, Farnell Link=https://uk.farnell.com/w/search/prl/results?st=MC0603B104K160CT&scope=partnumberlookahead&searchref=searchlookahead, Material=Ceramic, Mouser Link=https://eu.mouser.com/ProductDetail/AVX/06033C104KAT2A?qs=sGAEpiMZZMs0AnBnWHyRQNmRHsAguE21wvjfH6R99Ys%3d, PatternType=0603, TCC=+/-30ppm
C6 C9: library part Capacitors_SMD_10, "SMD Multilayer Ceramic Capacitor, 4.7 µF, 6.3 V, 0603 [1608 Metric], ± 10%, X7R, CL", Dielectric=X7R, Leakage Current=10uA, Manufacturer="SAMSUNG ELECTRO-MECHANICS", Manufacturer Part Number=CL10B475KQ8NQNC, Operating Temperature Range="-55C to 125C", Tolerance=+/-10%, Working Voltage=6.3V, ESR ESL=0.1Ohm/100MHz, Material=Ceramic, PatternType=0805, TCC=+/-30ppm
C12: library part Capacitors_SMD, "SMD Multilayer Ceramic Capacitor, 0.1 µF, 50 V, 0603 [1608 Metric], ± 10%, X7R, MC", Dielectric=X7R, Leakage Current=10uA, Manufacturer=MULTICOMP, Manufacturer Part Number=MC0603B104K500CT, Operating Temperature Range="-55C to 125C", Tolerance=+/-10%, Working Voltage=50V, Digikey Link=https://www.digikey.com/product-detail/en/avx-corporation/06033C104KAT2A/478-3714-1-ND/1116412, ESR ESL=0.1Ohm/100MHz, Material=Ceramic, PatternType=0603, TCC=+/-30ppm
C13 C17: library part Capacitors_SMD_10, "SMD Multilayer Ceramic Capacitor, 4.7 µF, 35 V, 0805 [2012 Metric], ± 10%, X7R, CGA", Dielectric=X7R, Leakage Current=10uA, Manufacturer=TDK, Manufacturer Part Number=CGA4J1X7R1V475K125AC, Operating Temperature Range="-55C to 125C", Tolerance=+/-10%, Working Voltage=35V, ESR ESL=0.1Ohm/100MHz, Material=Ceramic, PatternType=0805, TCC=+/-30ppm
C14: library part Capacitors_SMD_6, "CERAMIC CAPACITOR 1000PF, 50V, X7R, 20%, 0603", Dielectric=X7R, Leakage Current=10uA, Manufacturer=MULTICOMP, Manufacturer Part Number=MC0603B102M500CT, Operating Temperature Range="-55C to 125C", Tolerance=+/-20%, Working Voltage=50V, ESR ESL=0.1Ohm/100MHz, Material=Ceramic, PatternType=0603, TCC=+/-30ppm
C16: library part Capacitors_SMD_10, "SMD Multilayer Ceramic Capacitor, 22 µF, 6.3 V, 0805 [2012 Metric], ± 20%, X5R, GRM Series", Dielectric=X5R, Leakage Current=10uA, Manufacturer=MURATA, Manufacturer Part Number=GRM21BR60J226ME39K, Operating Temperature Range="-55C to 125C", Tolerance=+/-10%, Working Voltage=6.3V, ESR ESL=0.1Ohm/100MHz, Material=Ceramic, PatternType=0805, TCC=+/-30ppm
C18: library part Capacitors_SMD_14, "SMD Multilayer Ceramic Capacitor, 33 pF, 50 V, 0603 [1608 Metric], ± 5%, C0G / NP0, MC", Dielectric="COG (NPO)", Leakage Current=10uA, Manufacturer=MULTICOMP, Manufacturer Part Number=MC0603N330J500CT, Operating Temperature Range="-55C to 125C", Tolerance=+/-5%, Working Voltage=50, ESR ESL=0.1Ohm/100MHz, Farnell Link=https://www.newark.com/search?st=MC0603N330J500CT, Material=Ceramic, PatternType=0603, TCC=+/-30ppm
D1 D3: library part 1N4148WS, "Schottky Rectifier, Barrier, 30 V, 1 A, Single, SOD-323, 2 Pins, 560 mV", Case=SOD323, Current=1A, Manufacturer=NEXPERIA, Manufacturer Part Number=PMEG3010BEA,115, Temperature="-65 - +150C", Voltage=30V, Component Type=Standard, ComponentLink2Description=Datasheet, Part Number=PMEG3010BEA,115, Pb Free=Yes, Status=https://4donline.ihs.com/images/VipMasterIC/IC/PHGL/PHGLS19535/PHGLS19689-1.pdf?hkey=6D3A4C79FDBF58556ACFDE234799DDF0
D2: library part 3.0SMI30CA, "TVS Diode, TRANSZORB SMAJ, Bidirectional, 30 V, 48.4 V, DO-214AC (SMA), 2 Pins", Case=SMA, Manufacturer=BOURNS, Temperature="-55 - +150 C", Voltage=30V, Analogs=SMAJ30CA, Component Type=Standard, ComponentLink2Description=Datasheet, ComponentLink2URL=https://www.farnell.com/datasheets/2076055.pdf, Manufacturer Part Number=SMAJ30CA, Part Number=SMAJ30CA, Pb Free=Yes
D4: "Schottky Rectifier, Barrier, 30 V, 1 A, Single, SOD-323, 2 Pins, 560 mV", Case=SOD323, Current=1A, Manufacturer=NEXPERIA, Temperature="-65 - +150C", Voltage=30V, Component Type=Standard, ComponentLink2Description=Datasheet, Manufacturer Part Number=PMEG3010BEA,115, Pb Free=Yes, Status=https://4donline.ihs.com/images/VipMasterIC/IC/PHGL/PHGLS19535/PHGLS19689-1.pdf?hkey=6D3A4C79FDBF58556ACFDE234799DDF0
D5: "TVS DIODE 12VWM 29.5VC SOD323", Case=SOD323, Current=14A, Manufacturer=Bourns, Temperature="-55 - +150 C", Voltage=12V, Component Type=Standard, ComponentLink2Description=Datasheet, ComponentLink2URL=http://www.bourns.com/docs/Product-Datasheets/CDSOD323-TxxSC.pdf, Manufacturer Part Number=CDSOD323-T12SC, Part Number=CDSOD323-T12SC, Pb Free=Yes, Published=01.03.2018, Publisher=dlehkobyt, Status=CHECKED
F1: "RESETTABLE FUSE, PTC, 48VDC, 120mA, SMD, FULL REEL", Case=FUSE1206, Current=120mA, Manufacturer=LITTELFUSE, Manufacturer Part Number=NANOSMDC012F-2, Temperature="-40 - +85 C", Voltage=48VDC, Component Type=Standard, ComponentLink2Description=Datasheet, ComponentLink2URL=https://4donline.ihs.com/images/VipMasterIC/IC/LFSI/LFSI-S-A0002814467/LFSI-S-A0002814467-1.pdf?hkey=6D3A4C79FDBF58556ACFDE234799DDF0, Part Number=NANOSMDC012F-2, Pb Free=Yes
FB1: library part Inductor_SMD, "Ferrite Bead, 0603 [1608 Metric], 120 ohm, 800 mA, BLM18AG, 0.18 ohm, ± 25%", Manufacturer="Murata Electronics", Manufacturer Part Number=BLM18AG121BH1D, Maximum DC Current=800mA, Maximum DC Resistance=180mR, Operating Temperature Range="-55C to +125C", Tolerance=+/-25%, Digikey Link=https://www.digikey.com/product-detail/en/murata-electronics-north-america/BLM18AG121BH1D/490-14034-1-ND/6156034, Material="Ferrite Beads", Mouser Link=https://eu.mouser.com/ProductDetail/Murata-Electronics/BLM18AG121BH1D?qs=sGAEpiMZZMt1hubY80%2fs8LxeSWHv6KC8Ysx%252bo%2fdcLHuRxr%252bGZcH%2ffA%3d%3d, PatternType=0603
J1 J2: "Pin Header, Vertical, Board-to-Board, 1.27 mm, 1 Rows, 14 Contacts, Through Hole, TMS", Manufacturer=SAMTEC, Mouser Part Number=200-TMS11402LS, Datasheet Link=http://suddendocs.samtec.com/prints/tms-1xx-xx-xx-x-xx-xxx-mkt.pdf, Manufacturer Part Number=TMS-114-02-L-S, Mouser Price/Stock=https://www.mouser.co.uk/ProductDetail/Samtec/TMS-114-02-L-S?qs=%252BZP6%2F%252BtExtAXvdN94tPASA%3D%3D
J3: "Pin Header, Vertical, Board-to-Board, 1.27 mm, 1 Rows, 10 Contacts, Through Hole, TMS", Manufacturer=SAMTEC, Datasheet Link=http://suddendocs.samtec.com/prints/tms-1xx-xx-xx-x-xx-xxx-mkt.pdf, Manufacturer Part Number=TMS-110-02-L-S
J4: "TC2030-IDC 6-Pin Tag-Connect Plug-of-Nails™ Spring-Pin Cable with Legs"
L1: library part IFSC1515AHER2R2M01, "Power Inductor (SMD), 2.2 µH, 1.09 A, Shielded, 1.15 A, TYS", DC Current=1.09A, DC Resistance=0,11, Manufacturer=LAIRD, Temperature="-55 - +125 C", Tolerance=30%, Component Type=Standard, ComponentLink2Description=Datasheet, ComponentLink2URL=https://4donline.ihs.com/images/VipMasterIC/IC/LATE/LATE-S-A0003320560/LATE-S-A0003320560-1.pdf?hkey=6D3A4C79FDBF58556ACFDE234799DDF0, Manufacturer Part Number=TYS30102R2N-10, Part Number=TYS30102R2N-10, Pb Free=Yes
LD1: library part TLMG1100-GS08, "LED GREEN 0603 SMD", Case=LED0603, Color=Green, Current=20mA, Manufacturer="Vishay Semiconductors", Temperature="-40 - +100 C", Voltage=2.1V, Component Type=Standard, ComponentLink2Description=Datasheet, ComponentLink2URL=http://www.vishay.com/docs/83173/tlmb1100.pdf, Manufacturer Part Number=TLMG1100-GS08, Part Number=TLMG1100-GS08, Published=10.12.2014, Publisher=asavchenko, Status=CHECKED
LD2: library part TLMS1000-GS08, "LED RED 0603 SMD", Case=LED0603, Color=Red, Current=2mA, Manufacturer="Vishay Semiconductors", Temperature="-40 - +100 C", Voltage=1.8V, Component Type=Standard, ComponentLink2Description=Datasheet, ComponentLink2URL=http://www.vishay.com/docs/83172/tlmo1000.pdf, Manufacturer Part Number=TLMS1000-GS08, Part Number=TLMS1000-GS08, Published=04.12.2013, Publisher=dlegkobyt, Status=CHECKED
Q1 Q2: library part BC817-40LT1G, "TRANS NPN 45V 0.5A SOT23", Case=SOT23-3, Current=0.5A, Manufacturer="ONS, NXP", Temperature="-55 - +150 C", Voltage CEO=45V, Component Type=Standard, ComponentLink2Description=Datasheet, ComponentLink2URL=http://www.onsemi.com/pub/Collateral/BC817-16LT1-D.PDF, Manufacturer Part Number=BC817-40LT3G, Part Number=BC817-40LT3G, Pb Free=Yes
R1 R3 R4 R5 R6 R7 R8 R9 R10 R11 R12 R13 R17: library part Resistors_SMD, "SMD Chip Resistor, 10 kohm, ± 1%, 100 mW, 0603 [1608 Metric], Thick Film, General Purpose", Manufacturer=MULTICOMP, Manufacturer Part Number=MCWR06X1002FTL, Operating Temperature Range="-55C to 250C", Power Rating="0402 =50, 0603 =150, 0805 =200, 1206 =400mW", Tolerance=+/-1%, Working Voltage="0402, 0603 =75V, 0805 =100V, 1206 =200V", Farnell Link=https://uk.farnell.com/multicomp/mcwr06x1001ftl/res-1k-1-0-1w-0603-thick-film/dp/2447272, Material="Titalum nitride", PatternType=0603, TCR=+/-100ppm/C
R2 R15 R25: library part Resistors_SMD, "SMD Chip Resistor, 1 kohm, ± 1%, 100 mW, 0603 [1608 Metric], Thick Film, General Purpose", Manufacturer=MULTICOMP, Manufacturer Part Number=MCWR06X1001FTL, Operating Temperature Range="-55C to 250C", Power Rating="0402 =50, 0603 =150, 0805 =200, 1206 =400mW", Tolerance=+/-1%, Working Voltage="0402, 0603 =75V, 0805 =100V, 1206 =200V", Farnell Link=https://uk.farnell.com/multicomp/mcwr06x1001ftl/res-1k-1-0-1w-0603-thick-film/dp/2447272, Material="Titalum nitride", PatternType=0603, TCR=+/-100ppm/C
R14: library part Resistors_SMD, "SMD Chip Resistor, 22 kohm, ± 1%, 100 mW, 0603 [1608 Metric], Thick Film, General Purpose", Manufacturer=MULTICOMP, Manufacturer Part Number=MCWR06X2202FTL, Operating Temperature Range="-55C to 250C", Power Rating="0402 =50, 0603 =150, 0805 =200, 1206 =400mW", Tolerance=+/-1%, Working Voltage="0402, 0603 =75V, 0805 =100V, 1206 =200V", Material="Titalum nitride", PatternType=0603, TCR=+/-100ppm/C
R16 R20: library part Resistors_SMD_4, "SMD Chip Resistor, 100 kohm, ± 1%, 100 mW, 0603 [1608 Metric], Thick Film, General Purpose", Manufacturer=MULTICOMP, Manufacturer Part Number=MCWR06X1003FTL, Operating Temperature Range="-55C to 250C", Power Rating="0402 =50, 0603 =150, 0805 =200, 1206 =400mW", Tolerance=+/-1%, Working Voltage="0402, 0603 =75V, 0805 =100V, 1206 =200V", Farnell Link=https://uk.farnell.com/w/search/prl/results?st=MCWR06X1003FTL&scope=partnumberlookahead&searchref=searchlookahead, Material="Titalum nitride", PatternType=0603, TCR=+/-100ppm/C
R18: library part Resistors_SMD_24, "SMD Chip Resistor, 24 kohm, ± 1%, 100 mW, 0603 [1608 Metric], Thick Film, General Purpose", Manufacturer=MULTICOMP, Manufacturer Part Number=MCWR06X2402FTL, Operating Temperature Range="-55C to 250C", Power Rating="0402 =50, 0603 =150, 0805 =200, 1206 =400mW", Tolerance=+/-1%, Working Voltage="0402, 0603 =75V, 0805 =100V, 1206 =200V", Material="Titalum nitride", PatternType=0603, TCR=+/-100ppm/C
R19: library part Resistors_SMD_24, "SMD Chip Resistor, 47 kohm, ± 1%, 100 mW, 0603 [1608 Metric], Thick Film, General Purpose", Manufacturer=MULTICOMP, Manufacturer Part Number=MCWR06X4702FTL, Operating Temperature Range="-55C to 250C", Power Rating="0402 =50, 0603 =150, 0805 =200, 1206 =400mW", Tolerance=+/-1%, Working Voltage="0402, 0603 =75V, 0805 =100V, 1206 =200V", Farnell Link=https://www.newark.com/multicomp-pro/mcwr06x4702ftl/res-47k-1-100mw-0603-thick-film/dp/94X1641, Material="Titalum nitride", PatternType=0603, TCR=+/-100ppm/C
R21: library part Resistors_SMD_4, "SMD Chip Resistor, 1.8 Mohm, ± 1%, 100 mW, 0603 [1608 Metric], Thick Film, General Purpose", Manufacturer=YAGEO, Manufacturer Part Number=RC0603FR-071M8L, Operating Temperature Range="-55C to 250C", Power Rating="0402 =50, 0603 =150, 0805 =200, 1206 =400mW", Tolerance=+/-1%, Working Voltage="0402, 0603 =75V, 0805 =100V, 1206 =200V", Material="Titalum nitride", PatternType=0603, TCR=+/-100ppm/C
R22: library part Resistors_SMD_4, "SMD Chip Resistor, 200 kohm, ± 1%, 100 mW, 0603 [1608 Metric], Thick Film, General Purpose", Manufacturer=YAGEO, Manufacturer Part Number=RC0603FR-07200KL, Operating Temperature Range="-55C to 250C", Power Rating="0402 =50, 0603 =150, 0805 =200, 1206 =400mW", Tolerance=+/-1%, Working Voltage="0402, 0603 =75V, 0805 =100V, 1206 =200V", Material="Titalum nitride", PatternType=0603, TCR=+/-100ppm/C
R23: library part Resistors_SMD_4, "SMD Chip Resistor, 124 kohm, ± 1%, 100 mW, 0603 [1608 Metric], Thick Film, General Purpose", Manufacturer=YAGEO, Manufacturer Part Number=RC0603FR-07124KL, Operating Temperature Range="-55C to 250C", Power Rating="0402 =50, 0603 =150, 0805 =200, 1206 =400mW", Tolerance=+/-1%, Working Voltage="0402, 0603 =75V, 0805 =100V, 1206 =200V", Material="Titalum nitride", PatternType=0603, TCR=+/-100ppm/C
R24: library part Resistors_SMD_4, "Thick Film Resistors - SMD 32.4 Ohms 100 mW 0603 1%", Manufacturer=YAGEO, Manufacturer Part Number=RC0603FR-1340K2L, Operating Temperature Range="-55C to 250C", Power Rating="0402 =50, 0603 =150, 0805 =200, 1206 =400mW", Tolerance=+/-1%, Working Voltage="0402, 0603 =75V, 0805 =100V, 1206 =200V", Material="Titalum nitride", PatternType=0603, TCR=+/-100ppm/C
S1 S2: "DIP / SIP Switch, 4 Circuits, Raised Slide, Through Hole, SPST-NO, 24 V, 25 mA", Case=SW-DIP-16, Manufacturer="MULTICOMP PRO", Manufacturer Part Number=MCNDS-04V, Permitted current=0.05A, Temperature="-55..+85 C", Component Type="Dip switch", ComponentLink2Description=Datasheet, ComponentLink2URL=http://www.ctscorp.com/components/Datasheets/206-208.pdf, Part Number=MCNDS-04V, Pins number=16
U1: Manufacturer="Espressif Systems", Manufacturer Part Number=ESP32-WROOM-32E-N16
U2: library part CMP-08107-000010-1, "IC USB TO UART BRIDGE QFN24", Manufacturer=Silabs, Manufacturer Part Number=CP2102N-A02-GQFN24
U3: "Operational Amplifier, Dual, 2 Amplifier, 1.1 MHz, 0.6 V/µs, 3V to 30V, SOIC, 8 Pins", Case=SO-8, Manufacturer=STMICROELECTRONICS, Temperature="0 - + 70 C", Component Type=Standard, ComponentLink2Description=Datasheet, ComponentLink2URL=https://www.farnell.com/datasheets/2000357.pdf, Manufacturer Part Number=LM358DT, Part Number=LM358DT, Pb Free=Yes